# Altium PCB board.PcbDoc
Units mm, origin at the board's own origin, x right, y up, seen from the top; angles counter-clockwise.
Board outline 35 x 40 mm, 2 copper layers (Top Layer, Bottom Layer); 16 components, 20 nets, 44 pads, 0 vias.
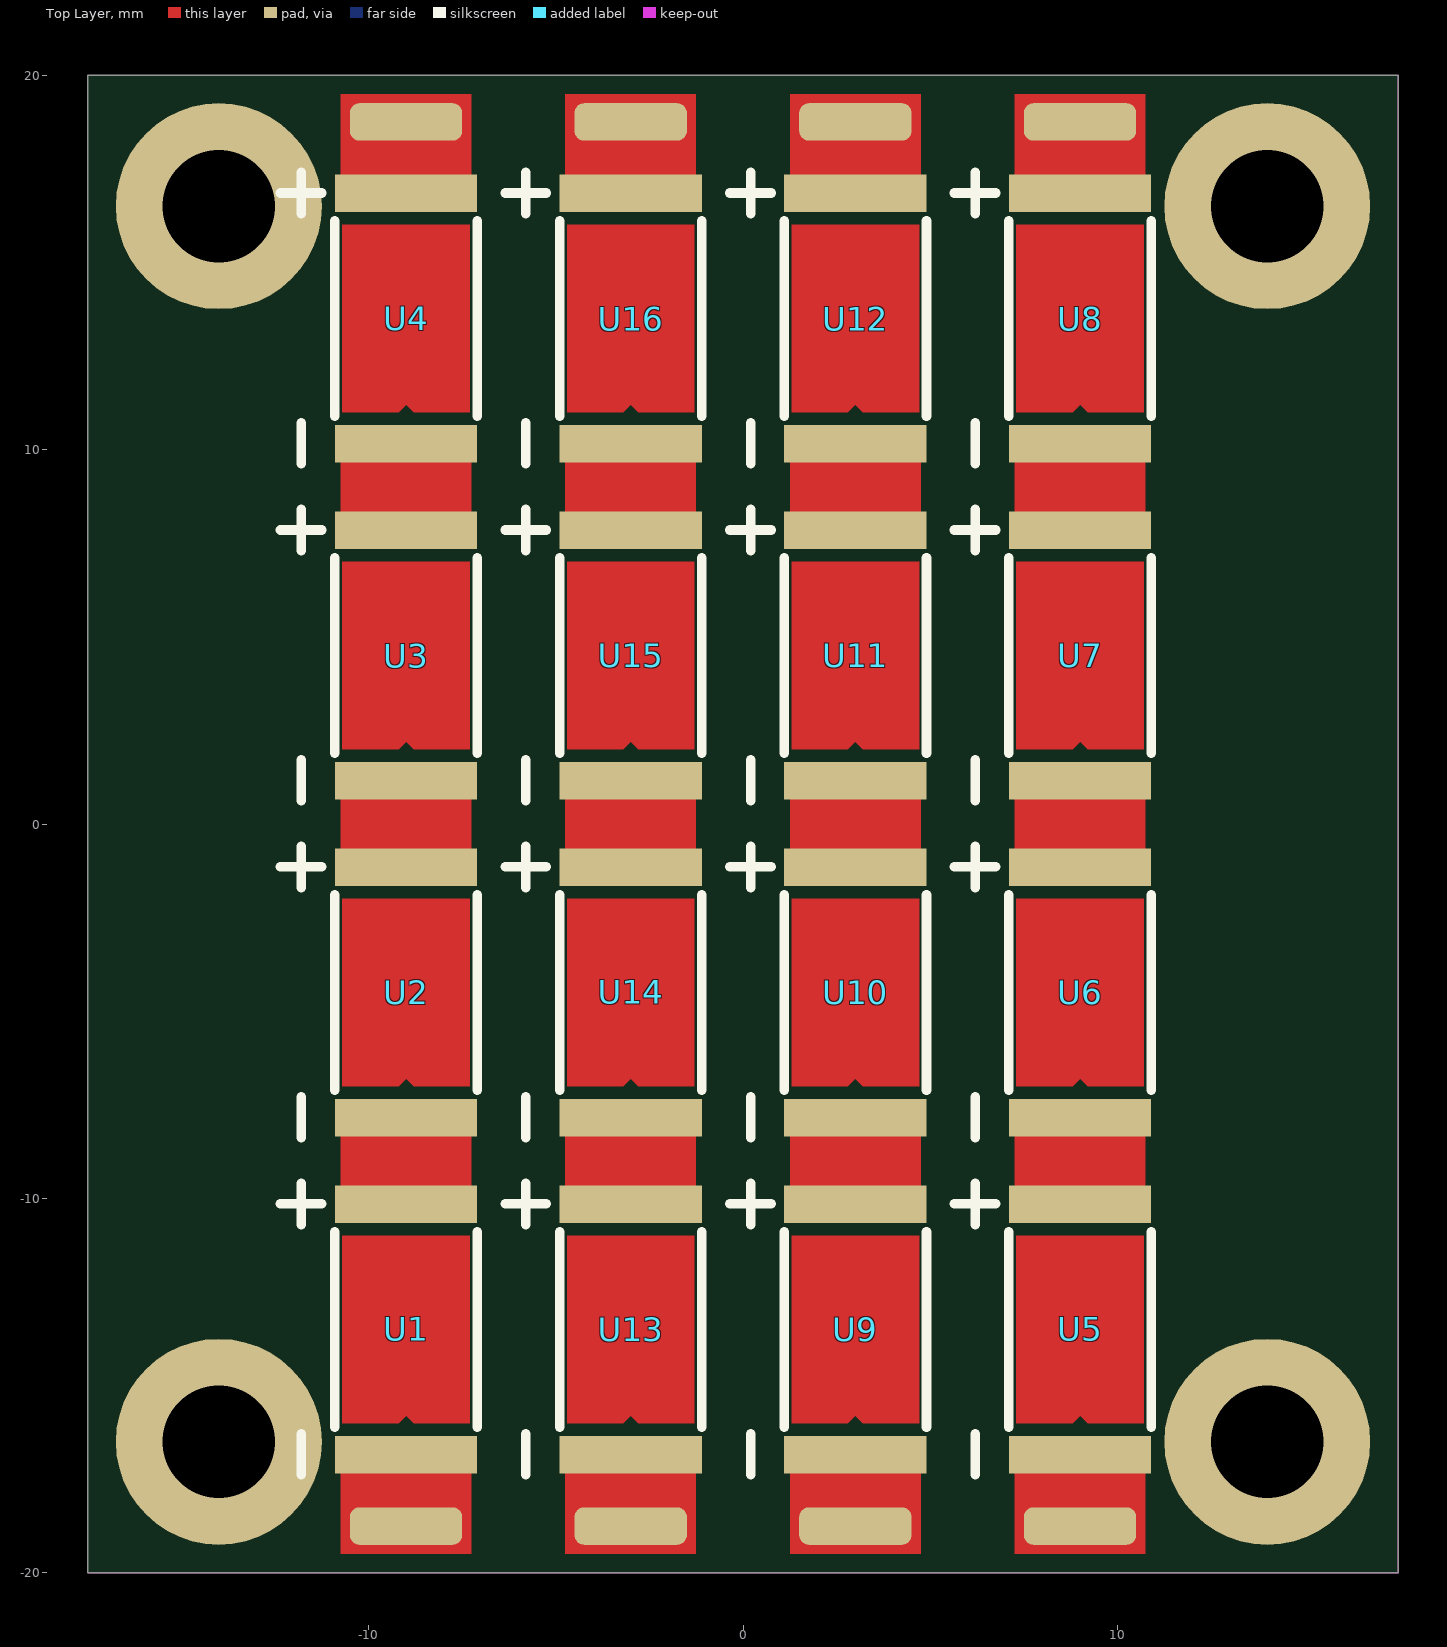
[diagram p0: Top Layer view]
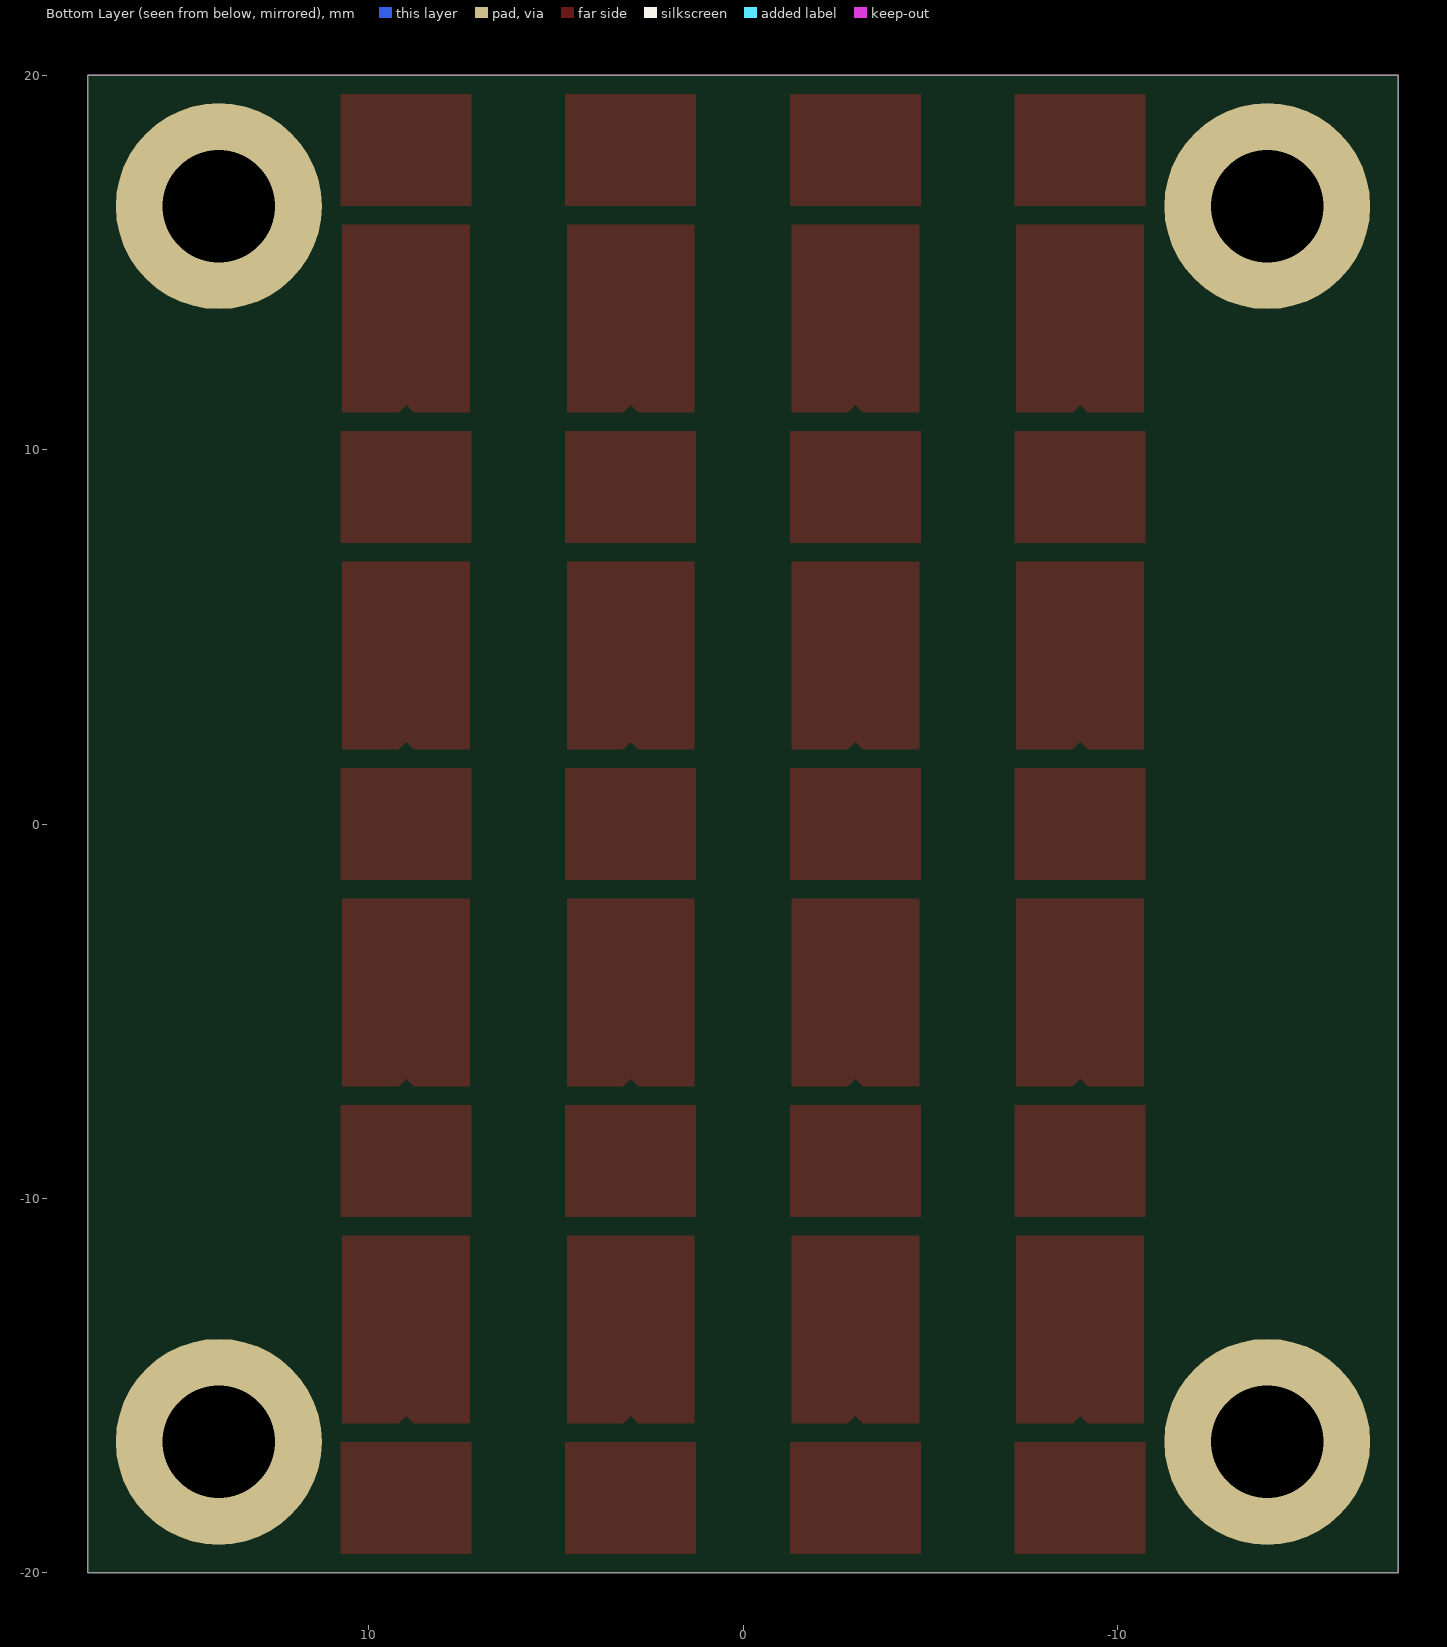
[diagram p1: Bottom Layer view, seen from below]

## Layer stack, top to bottom
Top Solder: solder mask 0.0102, Solder Resist, Dk 3.5
Top Layer: signal copper 0.0356
Dielectric 1: dielectric 0.32, FR-4, Dk 4.8
Bottom Layer: signal copper 0.0356
Bottom Solder: solder mask 0.0102, Solder Resist, Dk 3.5

## Board outline
-17.5,-20 -17.5,20 17.5,20 17.5,-20

## Design rules (kind name [scope] priority, off if disabled: settings)
AcuteAngle [All] p1: minimum=6.00000000000000E+0001 checktracksonly=FALSE
Clearance [All] p1: gap=0.18 ignorepadtopadclearanceinfootprint=FALSE except(0.3: Arc-Fill Arc-Poly Arc-Region Track-Fill Track-Poly Track-Region SMDPad-Fill SMDPad-Poly SMDPad-Region THPad-Fill THPad-Poly THPad-Region Via-Fill Via-Poly Via-Region Fill-Fill Fill-Poly Fill-Region Poly-Poly Poly-Region Region-Region)
ComponentClearance ComponentClearance_1 [HasFootprint('TP2030_SMD')] p1: gap=-1 collisioncheckmode=3 verticalgap=2540 showdistances=FALSE
ComponentClearance [All] p2: gap=0.254 collisioncheckmode=3 verticalgap=0.254 showdistances=FALSE
HoleSize [All] p1: absolutevalues=TRUE maxlimit=5 minlimit=1 maxpercent=80.000 minpercent=20.000
MinimumSolderMaskSliver [All] p1 off: minsoldermaskwidth=0.254
PermittedLayers [All] p1: toplayerpermitted=TRUE bottomlayerpermitted=FALSE
PlaneConnect [All] p1: planeconnectstyle=Direct reliefexpansion=0.508 reliefentries=4 reliefconductorwidth=0.254 reliefairgap=0.254
PolygonConnect [All] p1: connectstyle=Direct reliefconductorwidth=0.254 reliefentries=4 polygonreliefangle="90 Angle" airgapwidth=0.254
RoutingLayers [All] p1: top layer_v5=TRUE bottom layer_v5=FALSE
RoutingVias [All] p1: holewidth=0.711 width=1.27 viastyle="Through Hole" minholewidth=0.711 minwidth=1.27 maxholewidth=0.711 maxwidth=1.27
SilkToSolderMaskClearance [IsPad] p1 off: minsilkscreentomaskgap=0.254 clearancetoexposedcopper=TRUE
SolderMaskExpansion [All] p1: expansion=0.102 istentingtop=FALSE
UnRoutedNet [All] p1: checkbadconnections=TRUE
Width [All] p1: maxlimit=50 minlimit=0.2 preferedwidth=0.254
23 further rules are at their usual default settings.

## Classes and differential pairs
net class U16_Nets: A3 NetU15_3 NetU16_2
net class U15_Nets: NetU14_3 NetU15_2 NetU15_3
net class U14_Nets: NetU13_3 NetU14_2 NetU14_3
net class U13_Nets: C3 NetU13_2 NetU13_3
net class U12_Nets: A2 NetU11_3 NetU12_2
net class U11_Nets: NetU10_3 NetU11_2 NetU11_3
net class U10_Nets: NetU9_3 NetU10_1 NetU10_2 NetU10_3
net class U9_Nets: C2 NetU9_1 NetU9_2 NetU9_3
net class U8_Nets: A1 NetU7_3 NetU8_1 NetU8_2 NetU8_3
net class U7_Nets: NetU6_3 NetU7_1 NetU7_2 NetU7_3
net class U6_Nets: NetU5_3 NetU6_1 NetU6_2 NetU6_3
net class U5_Nets: C1 NetU5_1 NetU5_2 NetU5_3
net class U4_Nets: A0 NetU3_3 NetU4_1 NetU4_2 NetU4_3
net class U3_Nets: NetU2_3 NetU3_1 NetU3_2 NetU3_3
net class U2_Nets: NetU1_3 NetU2_1 NetU2_2 NetU2_3
net class U1_Nets: C0 NetU1_1 NetU1_2 NetU1_3

## Components (designator, comment, footprint, x,y, rotation, side; value= is the part's Value field where it differs from the comment)
U1 "XL-C3570P8S11-62C3C2" LED-SMD_3P-L7.0-W3.5_XL-C3570P5S10-62C3C2 -9,-13.5 r90 top
U2 "XL-C3570P8S11-62C3C2" LED-SMD_3P-L7.0-W3.5_XL-C3570P5S10-62C3C2 -9,-4.5 r90 top
U3 "XL-C3570P8S11-62C3C2" LED-SMD_3P-L7.0-W3.5_XL-C3570P5S10-62C3C2 -9,4.5 r90 top
U4 "XL-C3570P8S11-62C3C2" LED-SMD_3P-L7.0-W3.5_XL-C3570P5S10-62C3C2 -9,13.5 r90 top
U5 "XL-C3570P8S11-62C3C2" LED-SMD_3P-L7.0-W3.5_XL-C3570P5S10-62C3C2 9,-13.5 r90 top
U6 "XL-C3570P8S11-62C3C2" LED-SMD_3P-L7.0-W3.5_XL-C3570P5S10-62C3C2 9,-4.5 r90 top
U7 "XL-C3570P8S11-62C3C2" LED-SMD_3P-L7.0-W3.5_XL-C3570P5S10-62C3C2 9,4.5 r90 top
U8 "XL-C3570P8S11-62C3C2" LED-SMD_3P-L7.0-W3.5_XL-C3570P5S10-62C3C2 9,13.5 r90 top
U9 "XL-C3570P8S11-62C3C2" LED-SMD_3P-L7.0-W3.5_XL-C3570P5S10-62C3C2 3,-13.5 r90 top
U10 "XL-C3570P8S11-62C3C2" LED-SMD_3P-L7.0-W3.5_XL-C3570P5S10-62C3C2 3,-4.5 r90 top
U11 "XL-C3570P8S11-62C3C2" LED-SMD_3P-L7.0-W3.5_XL-C3570P5S10-62C3C2 3,4.5 r90 top
U12 "XL-C3570P8S11-62C3C2" LED-SMD_3P-L7.0-W3.5_XL-C3570P5S10-62C3C2 3,13.5 r90 top
U13 "XL-C3570P8S11-62C3C2" LED-SMD_3P-L7.0-W3.5_XL-C3570P5S10-62C3C2 -3,-13.5 r90 top
U14 "XL-C3570P8S11-62C3C2" LED-SMD_3P-L7.0-W3.5_XL-C3570P5S10-62C3C2 -3,-4.5 r90 top
U15 "XL-C3570P8S11-62C3C2" LED-SMD_3P-L7.0-W3.5_XL-C3570P5S10-62C3C2 -3,4.5 r90 top
U16 "XL-C3570P8S11-62C3C2" LED-SMD_3P-L7.0-W3.5_XL-C3570P5S10-62C3C2 -3,13.5 r90 top

## Footprints (in the part's own frame and the unit in brackets; to place one, negate y for a bottom-side part, rotate by r counter-clockwise, add the part's x,y. Pads: shape width x height; smd on the part's side, far side on the other; paste and mask are expansions set on the pad)
LED-SMD_3P-L7.0-W3.5_XL-C3570P5S10-62C3C2 [mm]
  rect 1x3.8 smd: 1(-3.34,0) 3(3.34,0)
  Top Layer region: -2.5,1.7 2.5,1.7 2.5,-1.7 -2.5,-1.7 -2.5,-0.2 -2.3,0 -2.5,0.2
  silkscreen extent -3.88,-1.9 3.9,3.35

## Part data
U1 U2 U3 U4 U5 U6 U7 U8 U9 U10 U11 U12 U13 U14 U15 U16: BOM_JLCPCB Part Class="Extended Part", BOM_Manufacturer=XINGLIGHT(成兴光), BOM_Manufacturer Part=XL-C3570P8S11-62C3C2, BOM_Supplier=LCSC, BOM_Supplier Part=C3646958, Contributor=lcsc, link=https://atta.szlcsc.com/upload/public/pdf/source/20220704/B3096392B255514FF7F2408DB5835905.pdf, spicePre=U, spiceSymbolName=XL-C3570P8S11-62C3C2

## Free pads (board coordinates)
  round 5.5 hole 3 unplated: M(-14,-16.5) M(-14,16.5) M(14,-16.5) M(14,16.5)
  rrect50% 3x1 smd: M1(-9,-18.75) M1(-9,18.75) M1(-3,-18.75) M1(-3,18.75) M1(3,-18.75) M1(3,18.75) M1(9,-18.75) M1(9,18.75)

## Nets (pads, with @x,y where several pads share a name; then routed paths per layer and width w, separated by ;. In a path a pad name is that pad's centre, name@x,y a point inside that pad or via, vN(x,y) a via of type N, cw(c..) or ccw(c..) an arc to the next point about the centre after c; other vN are vias at no path point)
A0: pad.M1@-9,18.75 U4.3
A1: pad.M1@9,18.75 U8.3
A2: pad.M1@3,18.75 U12.3
A3: pad.M1@-3,18.75 U16.3
C0: pad.M1@-9,-18.75 U1.1
C1: pad.M1@9,-18.75 U5.1
C2: pad.M1@3,-18.75 U9.1
C3: pad.M1@-3,-18.75 U13.1
NetU1_3: U1.3 U2.1
NetU2_3: U2.3 U3.1
NetU3_3: U3.3 U4.1
NetU5_3: U5.3 U6.1
NetU6_3: U6.3 U7.1
NetU7_3: U7.3 U8.1
NetU9_3: U9.3 U10.1
NetU10_3: U10.3 U11.1
NetU11_3: U11.3 U12.1
NetU13_3: U13.3 U14.1
NetU14_3: U14.3 U15.1
NetU15_3: U15.3 U16.1

## Keep-outs
Keep-Out Layer:
  the board outline again, w0

## Other copper
Top Layer:
  region net C2: 4.75,-16.5 1.25,-16.5 1.25,-19.5 4.75,-19.5
  region net C1: 10.75,-16.5 7.25,-16.5 7.25,-19.5 10.75,-19.5
  region net C3: -1.25,-16.5 -4.75,-16.5 -4.75,-19.5 -1.25,-19.5
  region net C0: -7.25,-16.5 -10.75,-16.5 -10.75,-19.5 -7.25,-19.5
  rectangle net NetU13_3: -4.75,-10.5 -1.25,-7.5
  rectangle net NetU1_3: -10.75,-10.5 -7.25,-7.5
  rectangle net NetU9_3: 1.25,-10.5 4.75,-7.5
  rectangle net NetU5_3: 7.25,-10.5 10.75,-7.5
  rectangle net A3: -4.75,16.5 -1.25,19.5
  rectangle net A0: -10.75,16.5 -7.25,19.5
  rectangle net A2: 1.25,16.5 4.75,19.5
  rectangle net A1: 7.25,16.5 10.75,19.5
  rectangle net NetU15_3: -4.75,7.5 -1.25,10.5
  rectangle net NetU3_3: -10.75,7.5 -7.25,10.5
  rectangle net NetU11_3: 1.25,7.5 4.75,10.5
  rectangle net NetU7_3: 7.25,7.5 10.75,10.5
  rectangle net NetU6_3: 7.25,-1.5 10.75,1.5
  rectangle net NetU10_3: 1.25,-1.5 4.75,1.5
  rectangle net NetU2_3: -10.75,-1.5 -7.25,1.5
  rectangle net NetU14_3: -4.75,-1.5 -1.25,1.5